# Altium PCB fpc.PcbDoc
Units mm, origin at the board's own origin, x right, y up, seen from the top; angles counter-clockwise.
Board outline 50.16 x 49.15 mm, 2 copper layers (Top Layer, Bottom Layer); 4 components, 50 nets, 103 pads, 0 vias.
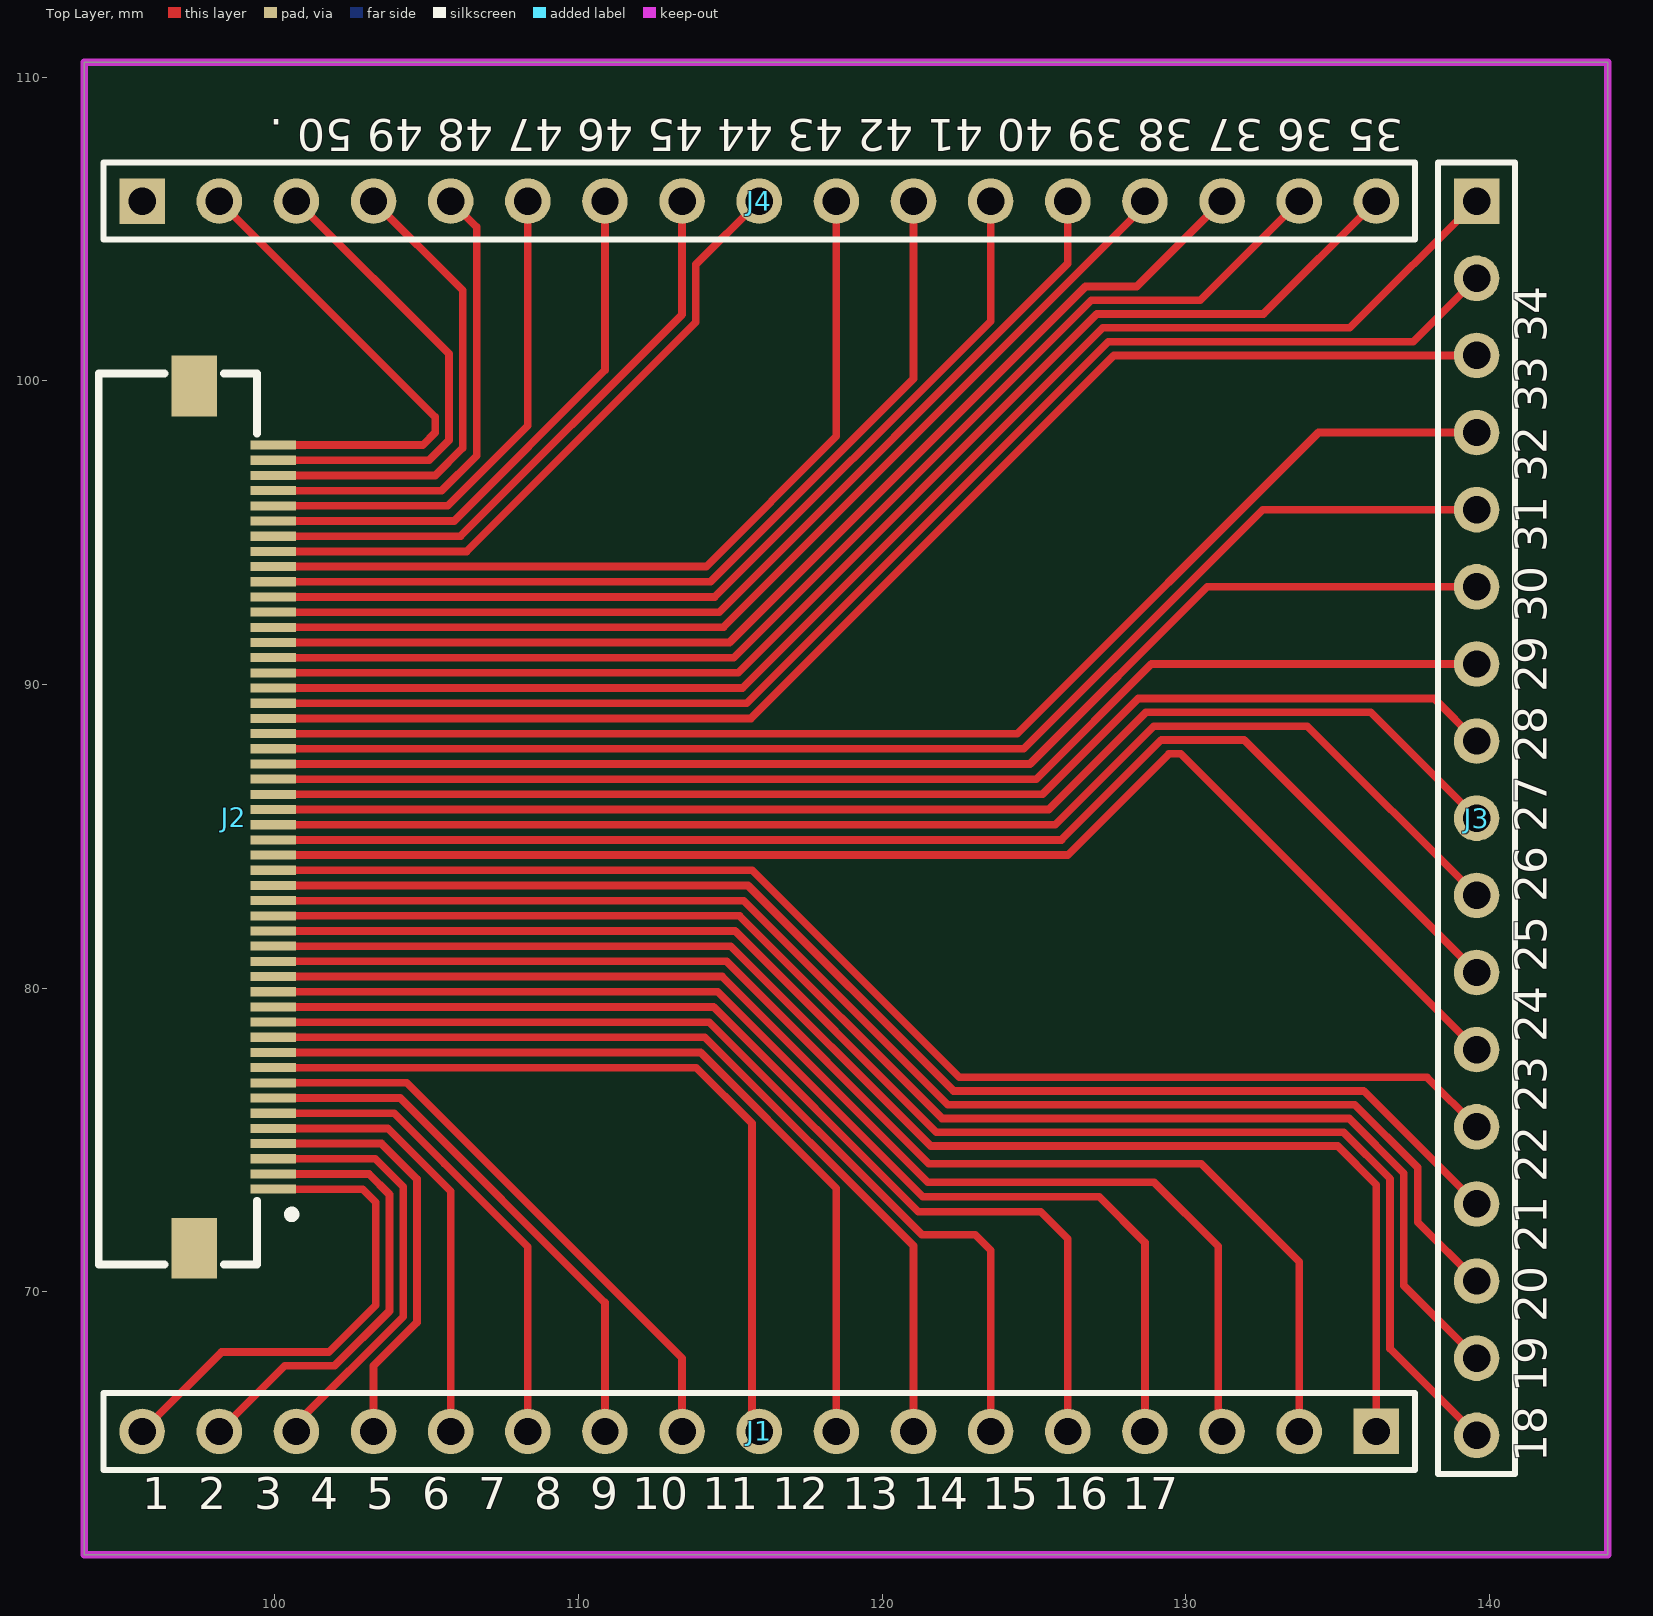
[diagram p0: Top Layer view]
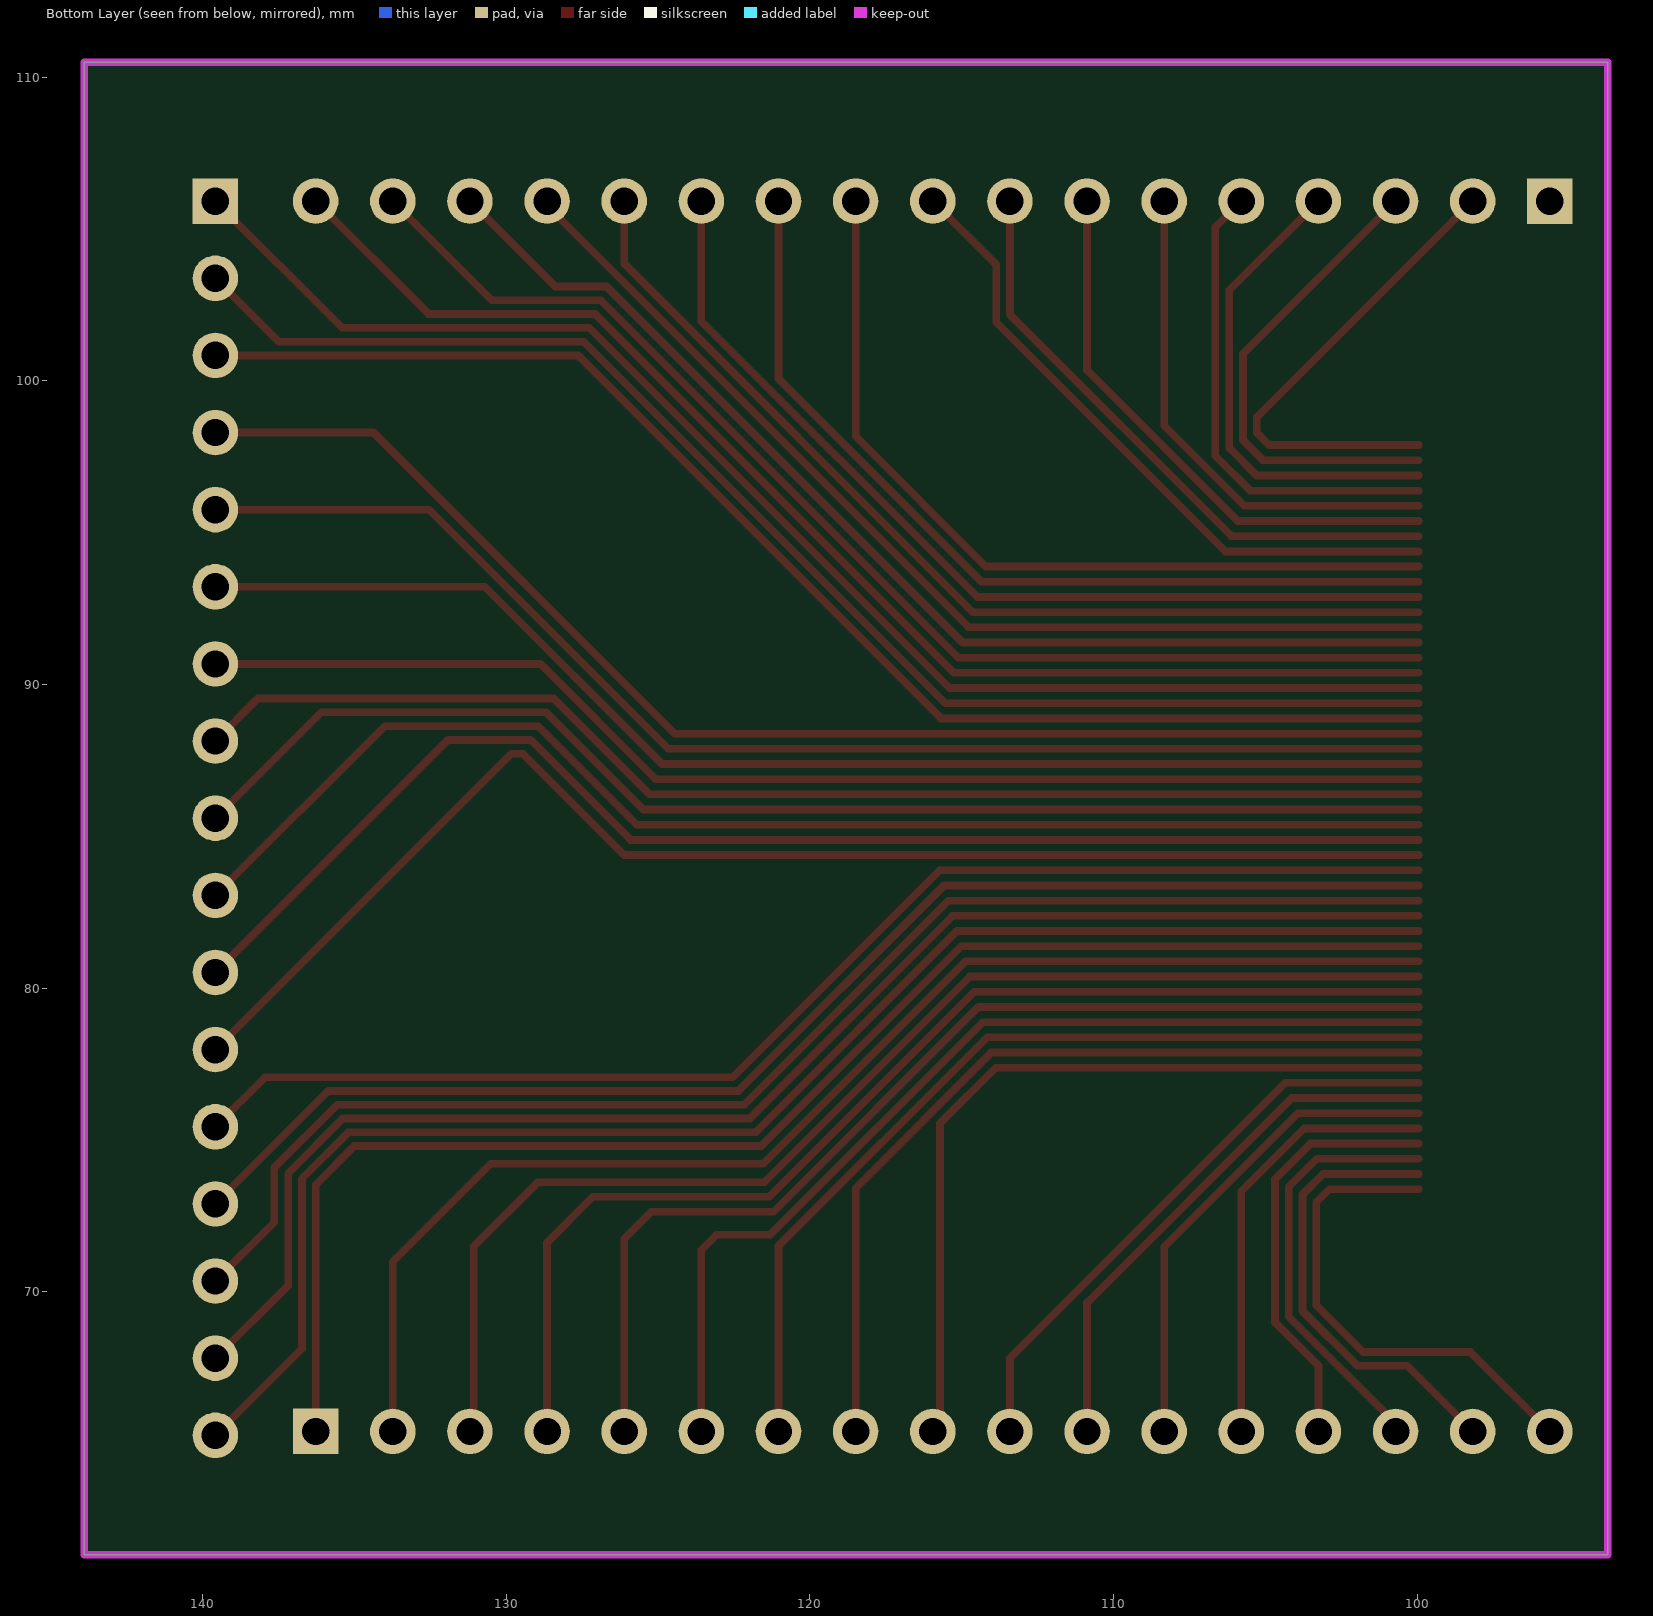
[diagram p1: Bottom Layer view, seen from below]

## Layer stack, top to bottom
Top Solder: solder mask 0.0102, Solder Resist, Dk 3.5
Top Layer: signal copper 0.0356
Dielectric 1: dielectric 0.32, FR-4, Dk 4.8
Bottom Layer: signal copper 0.0356
Bottom Solder: solder mask 0.0102, Solder Resist, Dk 3.5

## Board outline
93.726,61.341 143.891,61.341 143.891,110.49 93.726,110.49

## Design rules (kind name [scope] priority, off if disabled: settings)
Clearance [All] p1: gap=0.18 ignorepadtopadclearanceinfootprint=FALSE
PolygonConnect [All] p1: connectstyle=Relief reliefconductorwidth=0.254 reliefentries=4 polygonreliefangle="90 Angle" airgapwidth=0.254
RoutingVias [All] p1: holewidth=0.711 width=1.27 viastyle="Through Hole" minholewidth=0.711 minwidth=1.27 maxholewidth=0.711 maxwidth=1.27
SolderMaskExpansion [All] p1: expansion=0.102 istentingtop=FALSE
Width [All] p1: maxlimit=3 minlimit=0.1 preferedwidth=0.254 minimp=50.000000 maximp=50.000000 favimp=50.000000
30 further rules are at their usual default settings.

## Components (designator, comment, footprint, x,y, rotation, side; value= is the part's Value field where it differs from the comment)
J1 "Pin HDR1X17" "Pin HDR1X17/2.54mm-S" 136.271,65.405 r180 top
J2 "50PIN0.5后压" FPC-SMD_KH-FG0.5-H2.0-50PIN 98.649,85.634 r90 top
J3 "Pin HDR1X17" "Pin HDR1X17/2.54mm-S" 139.573,105.918 r270 top
J4 "Pin HDR1X17" "Pin HDR1X17/2.54mm-S" 95.631,105.918 r0 top

## Footprints (in the part's own frame and the unit in brackets; to place one, negate y for a bottom-side part, rotate by r counter-clockwise, add the part's x,y. Pads: shape width x height; smd on the part's side, far side on the other; paste and mask are expansions set on the pad)
FPC-SMD_KH-FG0.5-H2.0-50PIN [mm]
  rect 0.3x1.5 smd: 1(-12.25,-1.3) 2(-11.75,-1.3) 3(-11.25,-1.3) 4(-10.75,-1.3) 5(-10.25,-1.3) 6(-9.75,-1.3) 7(-9.25,-1.3) 8(-8.75,-1.3) 9(-8.25,-1.3) 10(-7.75,-1.3) 11(-7.25,-1.3) 12(-6.75,-1.3) 13(-6.25,-1.3) 14(-5.75,-1.3) 15(-5.25,-1.3) 16(-4.75,-1.3) 17(-4.25,-1.3) 18(-3.75,-1.3) 19(-3.25,-1.3) 20(-2.75,-1.3) 21(-2.25,-1.3) 22(-1.75,-1.3) 23(-1.25,-1.3) 24(-0.75,-1.3) 25(-0.25,-1.3) 26(0.25,-1.3) 27(0.75,-1.3) 28(1.25,-1.3) 29(1.75,-1.3) 30(2.25,-1.3) 31(2.75,-1.3) 32(3.25,-1.3) 33(3.75,-1.3) 34(4.25,-1.3) 35(4.75,-1.3) 36(5.25,-1.3) 37(5.75,-1.3) 38(6.25,-1.3) 39(6.75,-1.3) 40(7.25,-1.3) 41(7.75,-1.3) 42(8.25,-1.3) 43(8.75,-1.3) 44(9.25,-1.3) 45(9.75,-1.3) 46(10.25,-1.3) 47(10.75,-1.3) 48(11.25,-1.3) 49(11.75,-1.3) 50(12.25,-1.3)
  rect 2x1.5 smd: 51(14.2,1.3) 52(-14.2,1.3)
  silkscreen extent -14.73,-2.03 14.6,4.45
"Pin HDR1X17/2.54mm-S" [mm] "Connector; Header; 17 Position"
  rect 1.5x1.5 hole 0.9: 1(0,0)
  round 1.5 hole 0.9: 2(2.54,0) 3(5.08,0) 4(7.62,0) 5(10.16,0) 6(12.7,0) 7(15.24,0) 8(17.78,0) 9(20.32,0) 10(22.86,0) 11(25.4,0) 12(27.94,0) 13(30.48,0) 14(33.02,0) 15(35.56,0) 16(38.1,0) 17(40.64,0)
  silkscreen extent -1.27,-1.27 41.91,1.27, body extent -1.27,-1.27 41.91,1.27, height 7.58

## Part data
J2: BOM_JLCPCB Part Class="Extended Part", BOM_Manufacturer=null, BOM_Manufacturer Part=50PIN0.5后压, BOM_Supplier=LCSC, BOM_Supplier Part=C9900011403, Contributor=LCSC, spicePre=C, spiceSymbolName=50PIN0.5后压

## Nets (pads, with @x,y where several pads share a name; then routed paths per layer and width w, separated by ;. In a path a pad name is that pad's centre, name@x,y a point inside that pad or via, vN(x,y) a via of type N, cw(c..) or ccw(c..) an arc to the next point about the centre after c; other vN are vias at no path point)
NetJ1_1: J1.1 J2.17 | length 47.7
  Top Layer w0.254: J2.17 115.014,81.384 121.595,74.803 135.001,74.803 136.271,73.533 J1.1
NetJ1_2: J1.2 J2.16 | length 43.5
  Top Layer w0.254: J2.16 114.872,80.884 121.535,74.221 130.503,74.221 133.731,70.993 J1.2
NetJ1_3: J1.3 J2.15 | length 40.9
  Top Layer w0.254: J2.15 114.73,80.384 121.501,73.614 128.951,73.614 131.064,71.501 131.064,65.532 J1.3
NetJ1_4: J1.4 J2.14 | length 38.3
  Top Layer w0.254: J2.14 114.588,79.884 121.339,73.133 127.146,73.133 128.651,71.628 J1.4
NetJ1_5: J1.5 J2.13 | length 35.7
  Top Layer w0.254: J2.13 114.446,79.384 121.187,72.643 125.223,72.643 126.111,71.755 J1.5
NetJ1_6: J1.6 J2.12 | length 32.7
  Top Layer w0.254: J2.12 114.304,78.884 121.311,71.878 123.067,71.878 123.571,71.374 J1.6
NetJ1_7: J1.7 J2.11 | length 30
  Top Layer w0.254: J2.11 114.162,78.384 121.031,71.515 J1.7
NetJ1_8: J1.8 J2.10 | length 28.4
  Top Layer w0.254: J2.10 114.02,77.884 118.491,73.413 J1.8
NetJ1_9: J1.9 J2.9 | length 26.8
  Top Layer w0.254: J2.9 113.878,77.384 115.713,75.549 115.713,65.643 J1.9
NetJ1_10: J1.10 J2.8 | length 19.6
  Top Layer w0.254: J2.8 104.345,76.884 113.411,67.818 J1.10
NetJ1_11: J1.11 J2.7 | length 18
  Top Layer w0.254: J2.7 104.135,76.384 110.871,69.648 J1.11
NetJ1_12: J1.12 J2.6 | length 16.3
  Top Layer w0.254: J2.6 103.927,75.884 105.591,74.221 108.331,71.481 J1.12
NetJ1_13: J1.13 J2.5 | length 14.6
  Top Layer w0.254: J2.5 103.72,75.384 105.791,73.313 J1.13
NetJ1_14: J1.14 J2.4 | length 14.1
  Top Layer w0.254: J2.4 103.513,74.884 104.683,73.714 104.683,68.996 103.251,67.564 J1.14
NetJ1_15: J1.15 J2.3 | length 14.2
  Top Layer w0.254: J2.3 103.306,74.384 104.229,73.461 104.229,69.184 100.711,65.666 J1.15
NetJ1_16: J1.16 J2.2 | length 15.2
  Top Layer w0.254: J1.16 100.33,67.564 101.967,67.564 103.775,69.372 103.775,73.208 103.099,73.884 J2.2
NetJ1_17: J1.17 J2.1 | length 16.4
  Top Layer w0.254: J1.17 98.244,68.018 101.779,68.018 103.321,69.56 103.321,72.955 102.892,73.384 J2.1
NetJ2_18: J2.18 J3.17 | length 49.8
  Top Layer w0.254: J2.18 115.156,81.884 121.783,75.257 135.189,75.257 136.725,73.721 136.725,68.126 J3.17
NetJ2_19: J2.19 J3.16 | length 47.8
  Top Layer w0.254: J2.19 115.298,82.384 121.972,75.711 135.377,75.711 137.179,73.909 137.179,70.212 J3.16
NetJ2_20: J2.20 J3.15 | length 45.9
  Top Layer w0.254: J2.20 115.441,82.884 122.16,76.165 135.565,76.165 137.633,74.097 137.633,72.298 J3.15
NetJ2_21: J2.21 J3.14 | length 44
  Top Layer w0.254: J2.21 115.583,83.384 122.348,76.619 135.852,76.619 J3.14
NetJ2_22: J2.22 J3.13 | length 43.1
  Top Layer w0.254: J2.22 115.725,83.884 122.536,77.073 137.938,77.073 J3.13
NetJ2_23: J2.23 J3.12 | length 45
  Top Layer w0.254: J2.23 126.109,84.384 129.447,87.723 129.828,87.723 J3.12
NetJ2_24: J2.24 J3.11 | length 44.2
  Top Layer w0.254: J2.24 125.902,84.884 129.194,88.177 131.914,88.177 J3.11
NetJ2_25: J2.25 J3.10 | length 43.3
  Top Layer w0.254: J2.25 125.695,85.384 128.941,88.631 134,88.631 J3.10
NetJ2_26: J2.26 J3.9 | length 42.4
  Top Layer w0.254: J2.26 125.488,85.884 128.688,89.085 136.086,89.085 J3.9
NetJ2_27: J2.27 J3.8 | length 41.5
  Top Layer w0.254: J2.27 125.28,86.384 128.435,89.539 138.172,89.539 J3.8
NetJ2_28: J2.28 J3.7 | length 41.2
  Top Layer w0.254: J2.28 125.073,86.884 128.867,90.678 J3.7
NetJ2_29: J2.29 J3.6 | length 42
  Top Layer w0.254: J2.29 124.866,87.384 130.7,93.218 J3.6
NetJ2_30: J2.30 J3.5 | length 42.9
  Top Layer w0.254: J2.30 124.659,87.884 132.533,95.758 J3.5
NetJ2_31: J2.31 J3.4 | length 43.7
  Top Layer w0.254: J2.31 124.452,88.384 134.366,98.298 J3.4
NetJ2_32: J2.32 J3.3 | length 44.6
  Top Layer w0.254: J2.32 115.681,88.884 127.635,100.838 J3.3
NetJ2_33: J2.33 J3.2 | length 45.4
  Top Layer w0.254: J2.33 115.539,89.384 127.447,101.292 137.487,101.292 J3.2
NetJ2_34: J2.34 J3.1 | length 46.3
  Top Layer w0.254: J2.34 115.397,89.884 127.259,101.746 135.401,101.746 J3.1
NetJ2_35: J2.35 J4.17 | length 42.8
  Top Layer w0.254: J2.35 115.255,90.384 127.071,102.2 132.553,102.2 J4.17
NetJ2_36: J2.36 J4.16 | length 40
  Top Layer w0.254: J2.36 115.113,90.884 126.883,102.654 130.467,102.654 J4.16
NetJ2_37: J2.37 J4.15 | length 37.3
  Top Layer w0.254: J2.37 114.971,91.384 126.695,103.108 128.381,103.108 J4.15
NetJ2_38: J2.38 J4.14 | length 34.6
  Top Layer w0.254: J2.38 114.772,91.884 128.651,105.763 J4.14
NetJ2_39: J2.39 J4.13 | length 33
  Top Layer w0.254: J2.39 114.63,92.384 126.111,103.865 J4.13
NetJ2_40: J2.40 J4.12 | length 31.3
  Top Layer w0.254: J2.40 114.488,92.884 123.571,101.967 J4.12
NetJ2_41: J2.41 J4.11 | length 29.7
  Top Layer w0.254: J2.41 114.346,93.384 121.031,100.069 J4.11
NetJ2_42: J2.42 J4.10 | length 28.1
  Top Layer w0.254: J2.42 114.204,93.884 118.491,98.171 J4.10
NetJ2_43: J2.43 J4.9 | length 21.9
  Top Layer w0.254: J2.43 106.319,94.384 113.865,101.93 113.865,103.832 J4.9
NetJ2_44: J2.44 J4.8 | length 20.2
  Top Layer w0.254: J2.44 106.112,94.884 113.411,102.183 J4.8
NetJ2_45: J2.45 J4.7 | length 18.5
  Top Layer w0.254: J2.45 105.905,95.384 110.871,100.35 J4.7
NetJ2_46: J2.46 J4.6 | length 16.9
  Top Layer w0.254: J2.46 105.697,95.884 108.331,98.518 J4.6
NetJ2_47: J2.47 J4.5 | length 15.9
  Top Layer w0.254: J2.47 105.49,96.384 106.645,97.539 106.645,105.064 J4.5
NetJ2_48: J2.48 J4.4 | length 16
  Top Layer w0.254: J2.48 105.283,96.884 106.191,97.792 106.191,102.978 J4.4
NetJ2_49: J2.49 J4.3 | length 16
  Top Layer w0.254: J2.49 105.076,97.384 105.737,98.045 105.737,100.892 J4.3
NetJ2_50: J2.50 J4.2 | length 16.1
  Top Layer w0.254: J4.2 105.283,98.806 105.283,98.298 104.869,97.884 J2.50
pads on no net: J2.51 J2.52 J4.1

## Keep-outs
Keep-Out Layer:
  the board outline again, w0.254

## Silkscreen, mask and mechanical layers (free items; w line width, h text height)
Top Overlay:
  text "35 36 37 38 39 40 41 42 43 44 45 46 47 48 49 50 ." at 137.16,108.953 h1.81 r180
  text "18 19 20 21 22 23 24 25 26 27 28 29 30 31 32 33 34" at 142.227,64.389 h1.81 r90
  text "1  2  3  4  5  6  7  8  9 10 11 12 13 14 15 16 17" at 95.631,62.497 h1.81